# EAGLE board ECA0411_PCB_Monostable_Multivibrator (EAGLE 9.6.2)
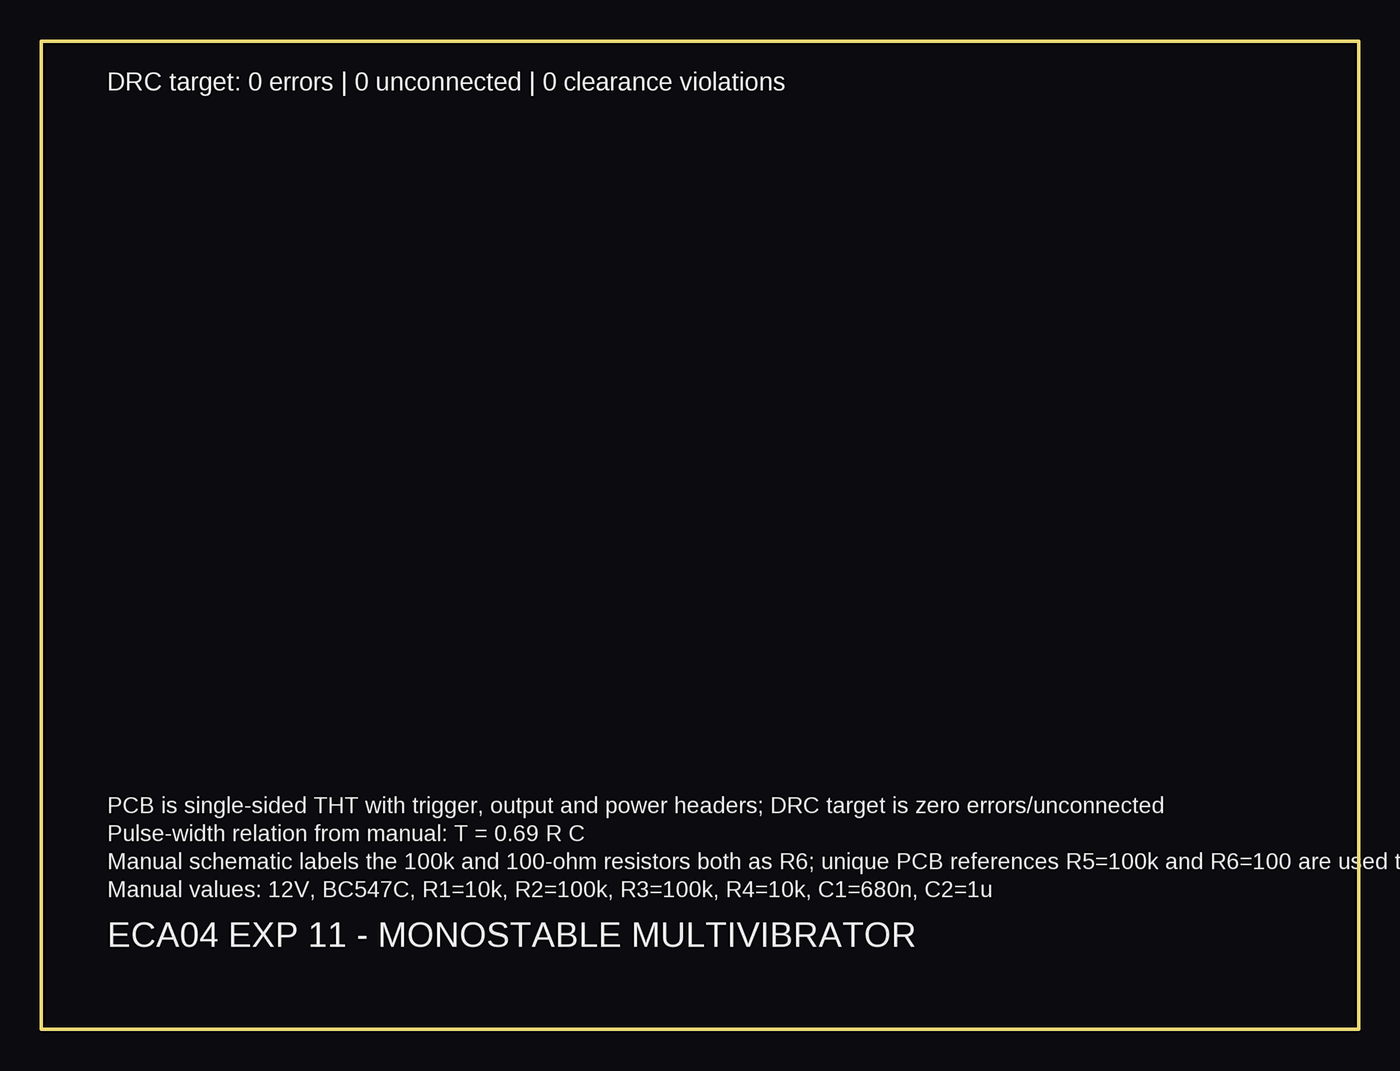
[diagram p0: board, top side]
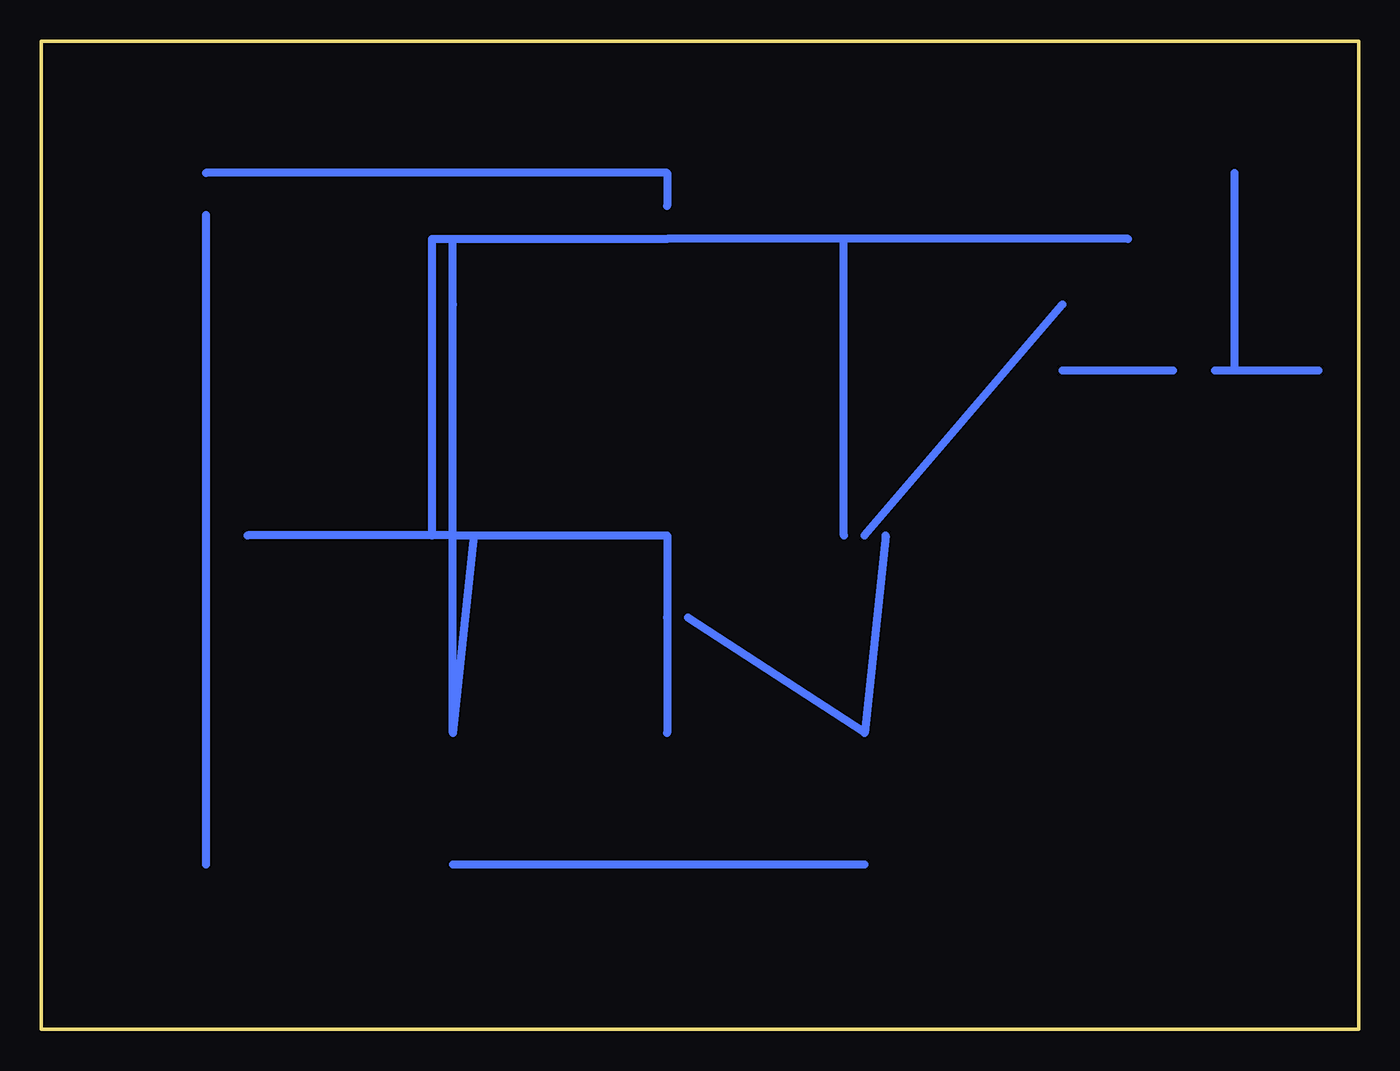
[diagram p1: board, bottom side, seen from below]

Size 80 x 60 mm. Coordinates in mm from the lower left corner, seen from the top.
Outline: 0,0 80,0 80,60 0,60 0,0
Copper layers (1*16): Top / Bottom
Design rules: minimum track width 20mil, minimum drill 36mil, track to track 6mil, track to pad 6mil, pad to pad 6mil, via to via 6mil

## Placement (x,y rotation side)
C1  680n  [C_THT]  42,25 0 top
C2  1u  [C_THT]  10,40 0 top
J1  TRIGGER  [HDR2]  5,40 0 top
J2  OUTPUT  [HDR2]  70,30 0 top
J3  VCC/GND  [HDR2]  70,52 0 top
Q1  BC547C  [TO92]  30,30 0 top
Q2  BC547C  [TO92]  55,30 0 top
R1  10k  [R_THT]  30,14 90 top
R2  100k  [R_THT]  55,14 90 top
R3  100k  [R_THT]  42,14 90 top
R4  10k  [R_THT]  55,48 0 top
R5  100k  [R_THT]  18,48 90 top
R6  100  [R_THT]  42,50 0 top

## Library data of the parts
C1 C2 J1-J3 Q1 Q2 R1-R6 = Custom

## Nets
EMITTER: Q1.3 Q2.3 R6.1
GND: J1.2 J3.2 R5.2 R6.2
Q1B: C2.2 Q1.2 R2.2 R5.1
Q1C: C1.1 Q1.1 R1.2
Q2B: C1.2 Q2.2 R3.2
Q2C_OUT: J2.1 Q2.1 R2.2 R4.1
TRIGGER: C2.1 J1.1
VCC: J3.1 R1.1 R2.1 R3.1 R4.1

## Tracks (layer width: path | path; a pad name or v marks a point on that pad's centre or on a via)
EMITTER
  Bottom 0.5: 31.27,30 31.27,48 42,48 56.27,48 56.27,30
GND
  Bottom 0.5: 14,48 42,48 | 70,52 42,52 42,50 | 7.54,40 7.54,52
Q1B
  Bottom 0.5: 30,30 18,44 | 18,44 | 11.27,40 18,40 | 55,18 55,30
Q1C
  Bottom 0.5: 28.73,30 30,18 40.73,25
Q2B
  Bottom 0.5: 55,30 42,30 42,25 42,18
Q2C_OUT
  Bottom 0.5: 53.73,30 55,18 55,44 55,48 | 55,30 67.46,30
TRIGGER
  Bottom 0.5: 2.46,40 8.73,40
VCC
  Bottom 0.5: 30,10 55,10 | 70,49.46 70,10 | 42,10

## Text on the board
tPlace: DRC target: 0 errors | 0 unconnected | 0 clearance violations | PCB is single-sided THT with trigger, output and power headers; DRC target is zero errors/unconnected | Pulse-width relation from manual: T = 0.69 R C | Manual schematic labels the 100k and 100-ohm resistors both as R6; unique PCB references R5=100k and R6=100 are used to avoid duplicate designators | Manual values: 12V, BC547C, R1=10k, R2=100k, R3=100k, R4=10k, C1=680n, C2=1u | ECA04 EXP 11 - MONOSTABLE MULTIVIBRATOR